# Altium PCB JacdacRgbLedRing8 37.PcbDoc
Units mm, origin at the board's own origin, x right, y up, seen from the top; angles counter-clockwise.
Board outline 34 x 37.5 mm, 2 copper layers (Top Layer, Bottom Layer), stack 1.525 mm thick; 40 components, 24 nets, 129 pads, 26 vias.
Unrouted connection lines stored in the file: 14.
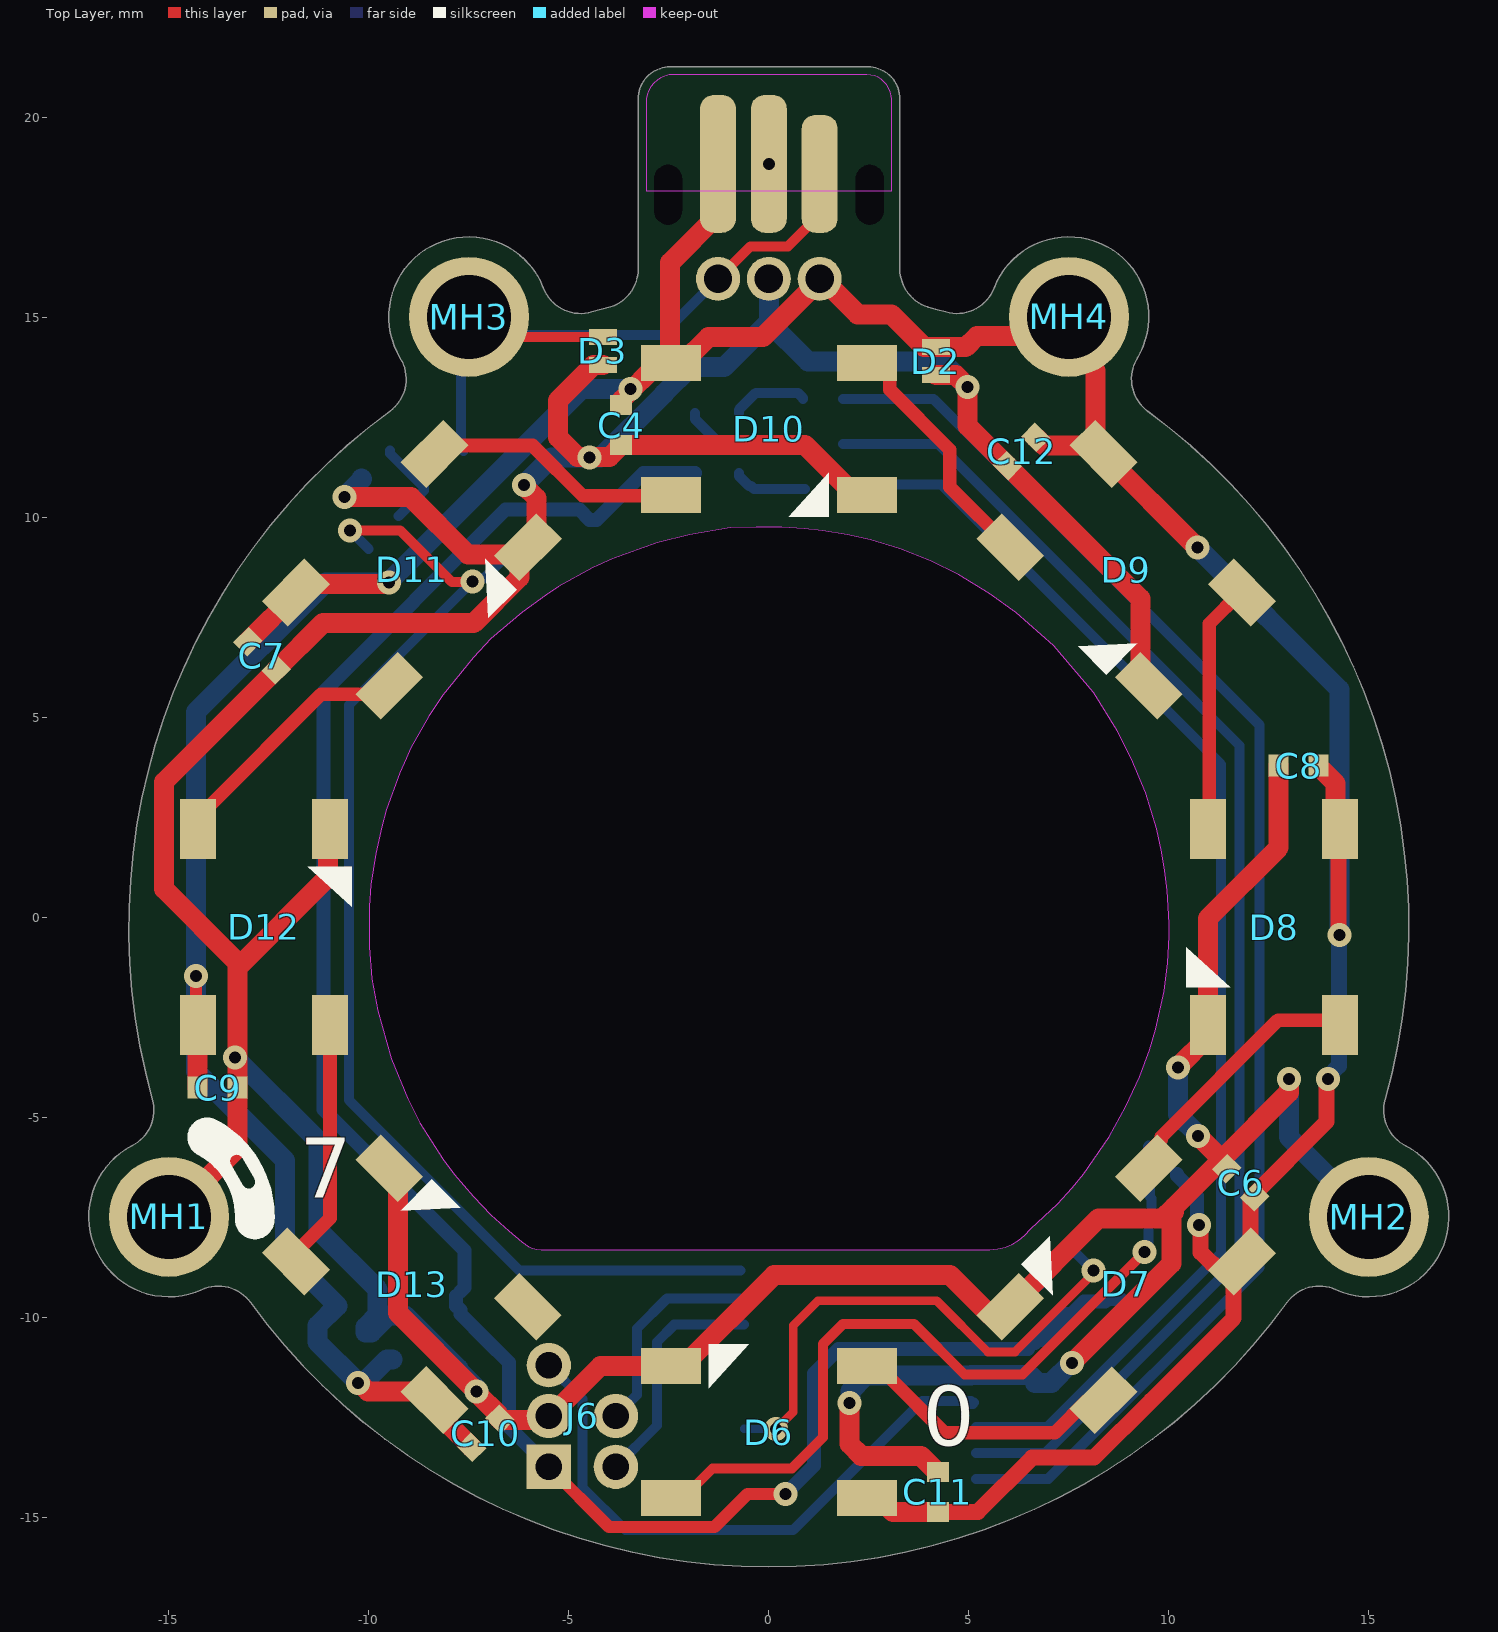
[diagram p0: Top Layer view]
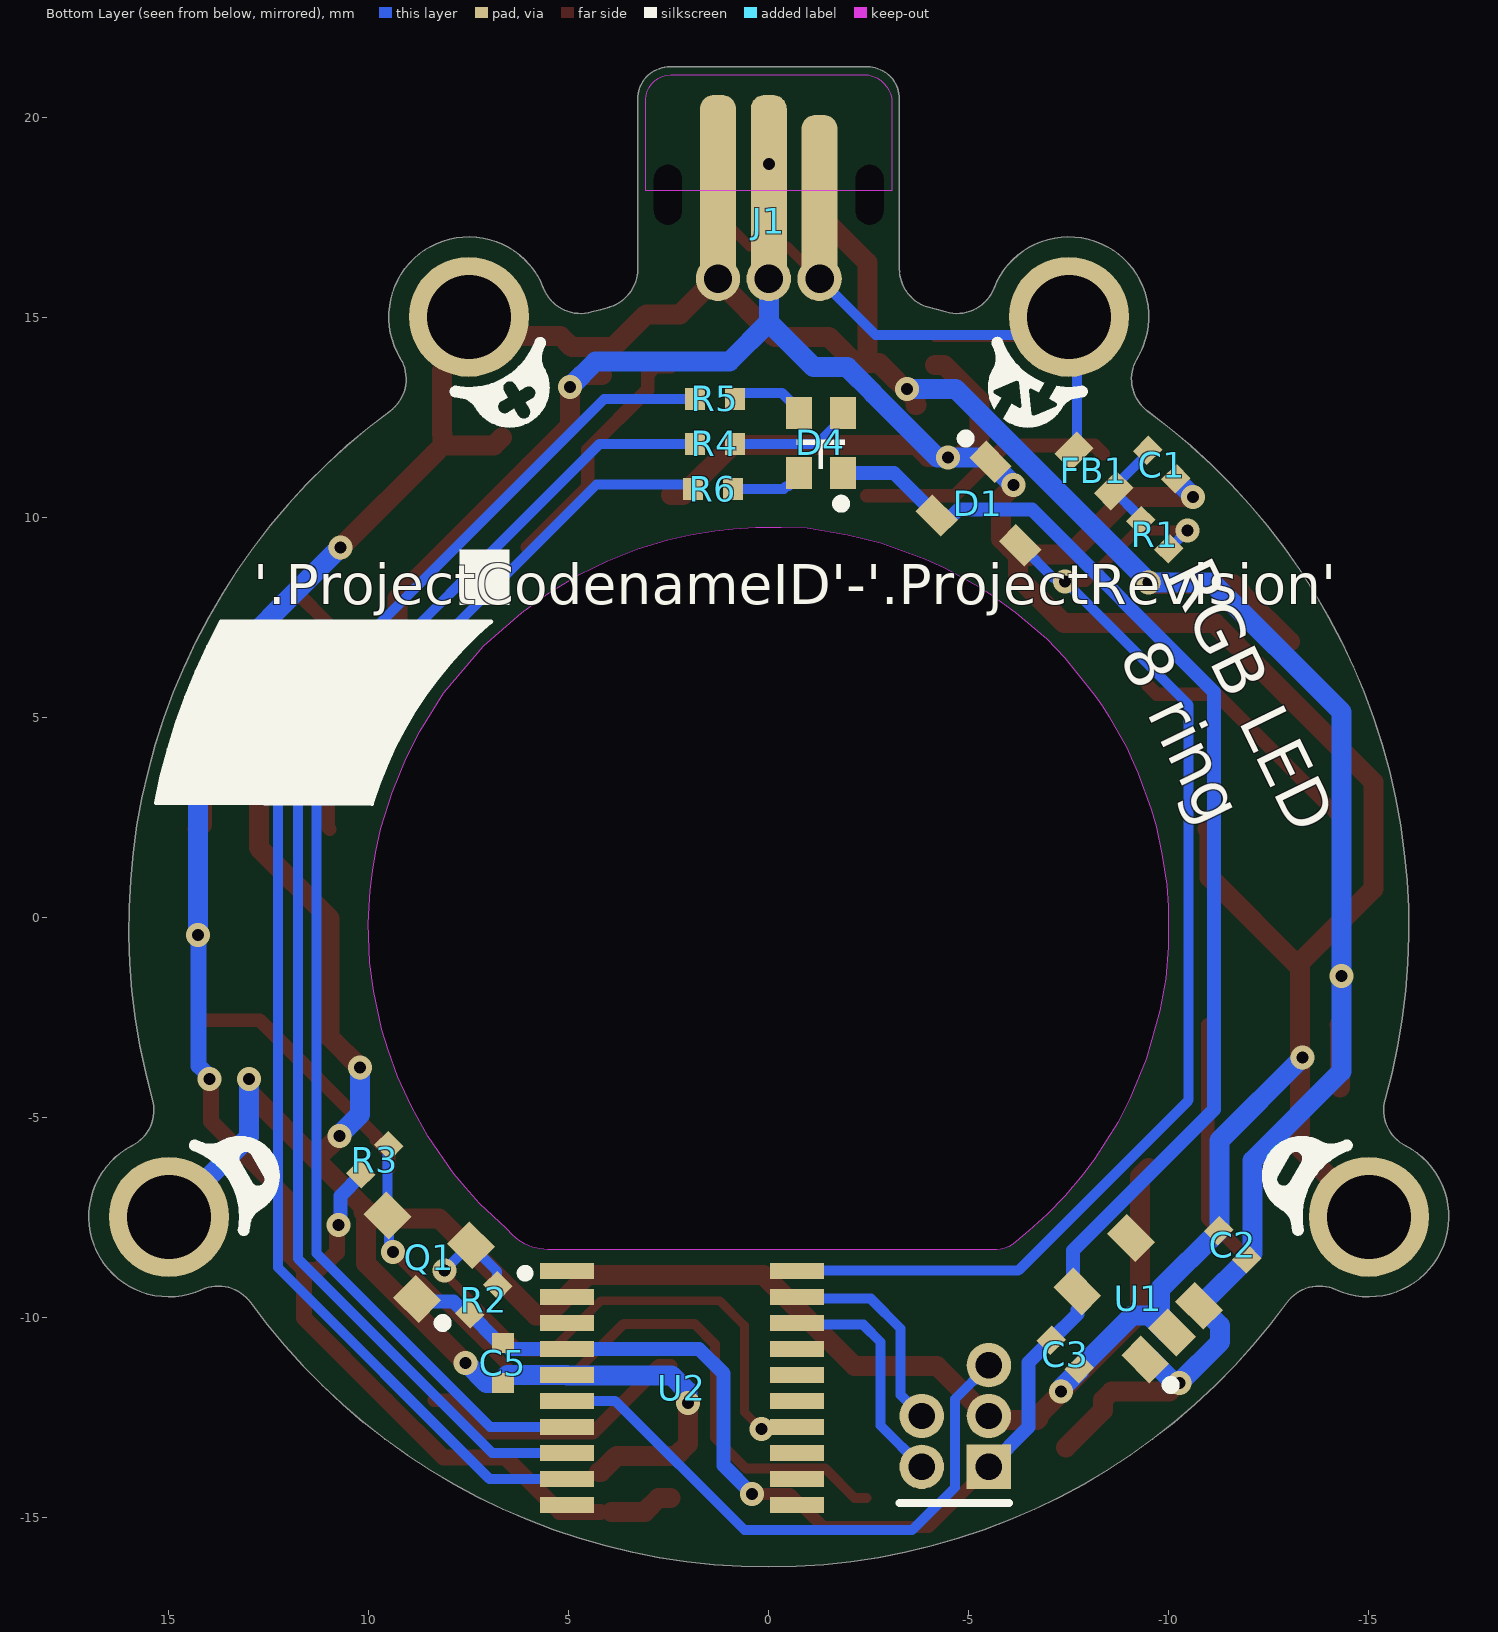
[diagram p1: Bottom Layer view, seen from below]
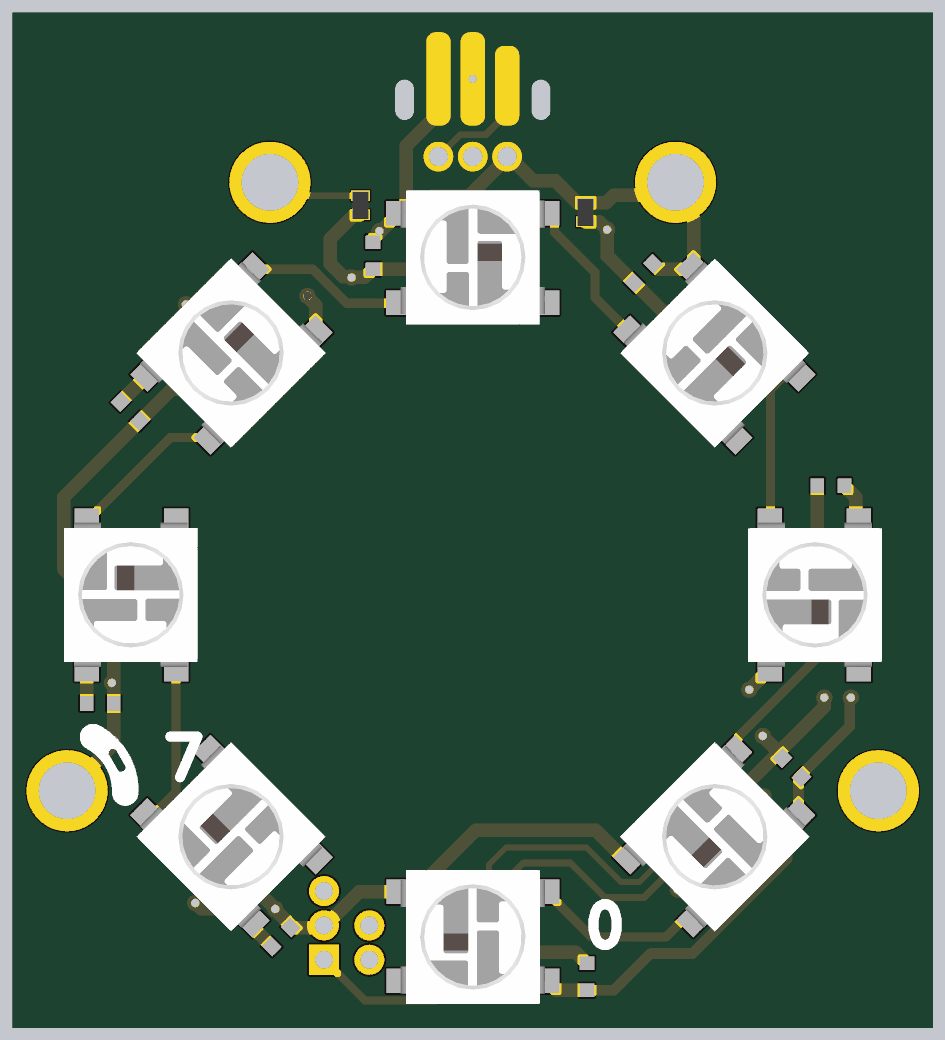
[diagram p2: 3D render of the assembled board from above, using the file's embedded part models]

## Layer stack, top to bottom
Top Solder: solder mask 0.0102, Solder Resist, Dk 3.5
Top Layer: signal copper 0.0356
Dielectric 1: core 1.454, FR-4, Dk 4.2
Bottom Layer: signal copper 0.0356
Bottom Solder: solder mask 0.0102, Solder Resist, Dk 3.5

## Board outline
-14.177,-9.297 cw(c-13.764,-10.209) -12.955,-9.622 ccw(c-0.001,-0.23) 12.953,-9.622 cw(c13.762,-10.209) 14.175,-9.297 ccw(c14.999,-7.475) 15.914,-5.697 cw(c16.371,-4.807) 15.408,-4.538 ccw(c-0.001,-0.23) 9.472,12.664 cw(c10.064,13.47) 9.209,13.988 ccw(c7.499,15.025) 5.634,15.746 cw(c4.701,16.107) 4.424,15.146 ccw(c0.003,-0.214) 3.99,15.264 ccw(c3.944,15.182) 3.963,15.274 cw(c4.276,16.225) 3.275,16.224 3.275,20.475 ccw(c2.476,20.475) 2.476,21.274 -2.466,21.274 ccw(c-2.466,20.475) -3.265,20.475 -3.265,16.224 cw(c-4.266,16.225) -3.953,15.274 ccw(c-0.003,-0.223) -4.426,15.146 cw(c-4.703,16.107) -5.636,15.746 ccw(c-7.501,15.025) -9.211,13.988 cw(c-10.067,13.47) -9.474,12.664 ccw(c-0.001,-0.23) -15.41,-4.538 cw(c-16.373,-4.807) -15.916,-5.697 ccw(c-15.001,-7.475)
cut-out: -9.775,-2.33 -9.44,-3.53 -9.028,-4.53 -8.721,-5.124 -8.153,-6.02 -7.862,-6.41 -7.394,-6.962 -6.95,-7.43 -6.5,-7.83 -6.177,-8.094 ccw(c-5.695,-7.613) -5.694,-8.294 -5.578,-8.293 5.529,-8.293 ccw(c5.527,-7.062) 6.396,-7.934 6.55,-7.78 7.225,-7.155 7.581,-6.751 7.873,-6.396 8.513,-5.476 8.925,-4.73 9.27,-3.98 9.518,-3.304 9.675,-2.783 9.88,-1.839 9.972,-1.121 10.006,-0.462 10.014,-0.149 9.988,0.27 9.96,0.69 9.902,1.177 9.825,1.641 9.695,2.22 9.418,3.131 9.066,3.99 8.713,4.679 8.125,5.62 7.125,6.795 6.18,7.632 5.529,8.102 4.75,8.57 4.031,8.922 3.27,9.22 2.53,9.445 1.958,9.576 1.35,9.678 0.889,9.73 0.328,9.759 -0.311,9.767 -0.966,9.755 -1.977,9.573 -2.794,9.372 -3.901,8.977 -4.403,8.748 -5.267,8.271 -5.578,8.069 -6.165,7.634 -6.95,6.97 -7.394,6.503 -8.153,5.56 -8.332,5.299 -8.498,5.041 -8.95,4.245 -9.065,3.991 -9.225,3.62 -9.559,2.707 -9.682,2.27 -9.825,1.595 -9.95,0.82 -9.987,0.27 -9.987,-0.73 -9.925,-1.53

## Design rules (kind name [scope] priority, off if disabled: settings)
AssemblyTestPointUsage [All] p1: valid=2
BoardOutlineClearance BoardOutlineSwitchClearance [InComponent('SW1')] p1: gap=0.3 ignorepadtopadclearanceinfootprint=FALSE except(0: Arc-SplitContinuation Track-SplitContinuation SMDPad-SplitContinuation THPad-OutlineEdge THPad-SplitContinuation Via-SplitContinuation Fill-SplitContinuation Poly-SplitContinuation Region-SplitContinuation Text-SplitContinuation; 0.2: Text-OutlineEdge)
BoardOutlineClearance [All] p2: gap=0.3 ignorepadtopadclearanceinfootprint=FALSE except(0: Arc-SplitContinuation Track-OutlineEdge Track-CutoutEdge Track-SplitContinuation SMDPad-SplitContinuation THPad-SplitContinuation Via-SplitContinuation Fill-SplitContinuation Poly-SplitContinuation Region-OutlineEdge Region-SplitContinuation Text-OutlineEdge Text-SplitContinuation; 0.2: SMDPad-CutoutEdge THPad-OutlineEdge; 0.25: Arc-OutlineEdge Arc-CutoutEdge SMDPad-OutlineEdge Poly-OutlineEdge Region-CutoutEdge)
Clearance [All] p1: gap=0.125 ignorepadtopadclearanceinfootprint=FALSE except(0: Arc-Hole Track-Hole SMDPad-Hole THPad-Hole Via-Hole Fill-Hole Poly-Hole Region-Hole Text-Hole)
ComponentClearance MH5.0KeepoutaAreaClearance [InComponent('MH1') or InComponent('MH2')  or InComponent('MH3') or InComponent('MH4') vs InComponent('D6') or InComponent('D7') or InComponent('D8') or InComponent('D9') or InComponent('D10') or InComponent('D11') or InComponent('D12') or InComponent('D13') or InComponent('C6') or InComponent('C7') or InComponent('C8')  or  InComponent('C9') or  InComponent('C12')] p1: gap=0 collisioncheckmode=3 verticalgap=0 showdistances=FALSE
ComponentClearance [All] p2: gap=0.2 collisioncheckmode=3 verticalgap=0.2 showdistances=FALSE
DiffPairsRouting [All] p1: maxlimit=2 minlimit=0.15 mostfreqgap=0.15 toplayer_minwidth=0.15 toplayer_maxwidth=2 toplayer_prefwidth=0.15 bottomlayer_minwidth=0.15 bottomlayer_maxwidth=2 bottomlayer_prefwidth=0.15 substack1={CB9D278B-8BF5-444A-AAF4-837A2A9DF42D} toplayer_{cb9d278b-8bf5-444a-aaf4-837a2a9df42d}_minwidth=0.381 toplayer_{cb9d278b-8bf5-444a-aaf4-837a2a9df42d}_maxwidth=0.381 toplayer_{cb9d278b-8bf5-444a-aaf4-837a2a9df42d}_prefwidth=0.381 bottomlayer_{cb9d278b-8bf5-444a-aaf4-837a2a9df42d}_minwidth=0.381 bottomlayer_{cb9d278b-8bf5-444a-aaf4-837a2a9df42d}_maxwidth=0.381 bottomlayer_{cb9d278b-8bf5-444a-aaf4-837a2a9df42d}_prefwidth=0.381 substack2={826B8647-A721-4255-895A-19F9591B9CD1} toplayer_{826b8647-a721-4255-895a-19f9591b9cd1}_minwidth=0.381 toplayer_{826b8647-a721-4255-895a-19f9591b9cd1}_maxwidth=0.381 toplayer_{826b8647-a721-4255-895a-19f9591b9cd1}_prefwidth=0.381 bottomlayer_{826b8647-a721-4255-895a-19f9591b9cd1}_minwidth=0.381 bottomlayer_{826b8647-a721-4255-895a-19f9591b9cd1}_maxwidth=0.381 bottomlayer_{826b8647-a721-4255-895a-19f9591b9cd1}_prefwidth=0.381 substack3={E64FCAF4-1BC8-437D-B1E0-0E5F2DC0F59E} toplayer_{e64fcaf4-1bc8-437d-b1e0-0e5f2dc0f59e}_minwidth=0.381 toplayer_{e64fcaf4-1bc8-437d-b1e0-0e5f2dc0f59e}_maxwidth=0.381 toplayer_{e64fcaf4-1bc8-437d-b1e0-0e5f2dc0f59e}_prefwidth=0.381 bottomlayer_{e64fcaf4-1bc8-437d-b1e0-0e5f2dc0f59e}_minwidth=0.381 bottomlayer_{e64fcaf4-1bc8-437d-b1e0-0e5f2dc0f59e}_maxwidth=0.381 bottomlayer_{e64fcaf4-1bc8-437d-b1e0-0e5f2dc0f59e}_prefwidth=0.381 substack4={E61CE66C-507C-4E1E-8E83-C905434AFC1C} toplayer_{e61ce66c-507c-4e1e-8e83-c905434afc1c}_minwidth=0.381 toplayer_{e61ce66c-507c-4e1e-8e83-c905434afc1c}_maxwidth=0.381 toplayer_{e61ce66c-507c-4e1e-8e83-c905434afc1c}_prefwidth=0.381 bottomlayer_{e61ce66c-507c-4e1e-8e83-c905434afc1c}_minwidth=0.381 bottomlayer_{e61ce66c-507c-4e1e-8e83-c905434afc1c}_maxwidth=0.381 bottomlayer_{e61ce66c-507c-4e1e-8e83-c905434afc1c}_prefwidth=0.381 maxuncoupledlength=25
FabricationTestPointUsage [All] p1: valid=2 allowmultiple=FALSE
HoleSize [All] p1: absolutevalues=TRUE maxlimit=2.54 minlimit=0.2 maxpercent=80.000 minpercent=20.000
MinimumSolderMaskSliver [All] p1: minsoldermaskwidth=0.005
PlaneClearance [All] p1: clearance=0.3
PlaneConnect [All] p1: planeconnectstyle=Relief reliefexpansion=0.5 reliefentries=4 reliefconductorwidth=0.2 reliefairgap=0.3
PolygonConnect "PolygonConnect GND" [isVIA] p1: connectstyle=Relief reliefconductorwidth=0.2 reliefentries=4 polygonreliefangle="90 Angle" airgapwidth=0.2
PolygonConnect [All] p2: connectstyle=Relief reliefconductorwidth=0.2 reliefentries=4 polygonreliefangle="90 Angle" airgapwidth=0.2
RoutingVias [All] p1: holewidth=0.3 width=0.6 viastyle="Through Hole" minholewidth=0.3 minwidth=0.6 maxholewidth=0.3 maxwidth=0.8
SilkToSilkClearance [All] p1: silktosilkclearance=0.001
SilkToSolderMaskClearance [IsPad] p1: minsilkscreentomaskgap=0.05 clearancetoexposedcopper=TRUE
SolderMaskExpansion [All] p1: expansion=0.075 istentingtop=FALSE
Width [All] p1: maxlimit=2 minlimit=0.15 preferedwidth=0.15 substack1={CB9D278B-8BF5-444A-AAF4-837A2A9DF42D} substack2={826B8647-A721-4255-895A-19F9591B9CD1} substack3={E64FCAF4-1BC8-437D-B1E0-0E5F2DC0F59E} substack4={E61CE66C-507C-4E1E-8E83-C905434AFC1C} minimp=50.000000 maximp=50.000000 favimp=50.000000
20 further rules are at their usual default settings.

## Components (designator, comment, footprint, x,y, rotation, side; value= is the part's Value field where it differs from the comment)
C1 "CL05C330JB51PNC" "C0402_0.55MM - WITHOUT OUTLINE" -9.825,11.33 r45 bottom
C2 "CL05A105KP5NNNC" "C0402_0.55MM - WITHOUT OUTLINE" -11.6,-8.175 r225 bottom
C3 "CL05A105KP5NNNC" "C0402_0.55MM - WITHOUT OUTLINE" -7.411,-10.915 r45 bottom
C4 "CL05B104KP5NNNC" "C0402_0.55MM - WITHOUT OUTLINE" -3.695,12.317 r90 top
C5 "CL05A105KP5NNNC" "C0402_0.55MM - WITHOUT OUTLINE" 6.65,-11.125 r90 bottom
C6 "CL05B104KP5NNNC" "C0402_0.55MM - WITHOUT OUTLINE" 11.8,-6.625 r315 top
C7 "CL05B104KP5NNNC" "C0402_0.55MM - WITHOUT OUTLINE" -12.672,6.55 r135 top
C8 "CL05B104KP5NNNC" "C0402_0.55MM - WITHOUT OUTLINE" 13.247,3.806 r0 top
C9 "CL05B104KP5NNNC" "C0402_0.55MM - WITHOUT OUTLINE" -13.778,-4.244 r180 top
C10 "CL05B104KP5NNNC" "C0402_0.55MM - WITHOUT OUTLINE" -7.078,-12.886 r225 top
C11 "CL05B104KP5NNNC" "C0402_0.55MM - WITHOUT OUTLINE" 4.225,-14.35 r270 top
C12 "CL05B104KP5NNNC" "C0402_0.55MM - WITHOUT OUTLINE" 6.317,11.658 r45 top
D1 "BAT54S" "NXP-BAT54S-TO-236AB - WITHOUT OUTLINE" -5.578,10.02 r225 bottom
D2 "RCLAMP0521P-N" "TVS 0402 - L" 4.174,13.915 r270 top
D3 "RCLAMP0521P-N" "TVS 0402 - L" -4.15,14.175 r270 top
D4 "TZ-P4-1615RGBTCA1-0.55T" TZ-P4-1615RGBTCA1-0.55T -1.3,11.875 r90 bottom
D6 "WS2812E" WS2812E-5050 0.004,-12.856 r180 top
D7 "WS2812E" WS2812E-5050 8.931,-9.159 r225 top
D8 "WS2812E" WS2812E-5050 12.63,-0.232 r270 top
D9 "WS2812E" WS2812E-5050 8.932,8.696 r315 top
D10 "WS2812E" WS2812E-5050 0,12.225 r0 top
D11 "WS2812E" WS2812E-5050 -8.922,8.697 r45 top
D12 "WS2812E" WS2812E-5050 -12.621,-0.23 r90 top
D13 "WS2812E" WS2812E-5050 -8.923,-9.158 r135 top
FB1 "TDK MPZ1608S102ATA00" "TDK MPZ1608 0.8mm - without outline" -8.125,11.175 r225 bottom
J1 "3 pin JACDAC edge connector" JACDAC_EDGE_CONNECTOR_NO_TRACES 0,15.425 r180 bottom
J6 "Hack Connect Mini 1.27 mm pitch 2-row" HACK_CONNECT_MINI_5_X_1_27 -5.501,-13.725 r0 top
MH1 "MH_5.0MMK_3.0MMC_2.1MMD_PTH" MH_5.0MMK_3.0MMC_2.1MMD_PTH -15.001,-7.475 r90 top
MH2 "MH_5.0MMK_3.0MMC_2.1MMD_PTH" MH_5.0MMK_3.0MMC_2.1MMD_PTH 14.998,-7.476 r45 top
MH3 "MH_5.0MMK_3.0MMC_2.1MMD_PTH" MH_5.0MMK_3.0MMC_2.1MMD_PTH -7.501,15.025 r90 top
MH4 "MH_5.0MMK_3.0MMC_2.1MMD_PTH" MH_5.0MMK_3.0MMC_2.1MMD_PTH 7.499,15.025 r0 top
Q1 "2N7002K" SOT-23 8.825,-8.15 r45 bottom
R1 "RC0402FR-07220RL" "R0402 - Without outline" -9.65,9.575 r45 bottom
R2 "10k" "R0402 - Without outline" 7.125,-9.55 r135 bottom
R3 "10k" "R0402 - Without outline" 9.85,-6.05 r135 bottom
R4 "RC0402FR-0730RL" "R0402 - WITHOUT OUTLINE" 1.35,11.85 r0 bottom
R5 "RC0402FR-0730RL" "R0402 - Without outline" 1.35,12.975 r0 bottom
R6 "RC0402FR-07150RL" "R0402 - Without outline" 1.4,10.725 r0 bottom
U1 "LDO 3.3V/300 mA" "ON_SEMI-SOT23-5 - WITHOUT OUTLINE" -9.234,-9.523 r45 bottom
U2 "STM32G031F6P6" 20-TSSOP 2.175,-11.75 r180 bottom

## Footprints (in the part's own frame and the unit in brackets; to place one, negate y for a bottom-side part, rotate by r counter-clockwise, add the part's x,y. Pads: shape width x height; smd on the part's side, far side on the other; paste and mask are expansions set on the pad)
20-TSSOP [mm] "0.173\", 4.40mm Width"
  rect 1.35x0.4 smd: 1(-2.875,2.925) 2(-2.875,2.275) 3(-2.875,1.625) 4(-2.875,0.975) 5(-2.875,0.325) 6(-2.875,-0.325) 7(-2.875,-0.975) 8(-2.875,-1.625) 9(-2.875,-2.275) 10(-2.875,-2.925) 11(2.875,-2.925) 12(2.875,-2.275) 13(2.875,-1.625) 14(2.875,-0.975) 15(2.875,-0.325) 16(2.875,0.325) 17(2.875,0.975) 18(2.875,1.625) 19(2.875,2.275) 20(2.875,2.925)
  silkscreen extent -4,2.78 -3.83,2.95, body extent -3.3,-3.3 3.3,3.3, height 1.2
"C0402_0.55MM - WITHOUT OUTLINE" [mm]
  rect 0.5x0.55 smd: 1(-0.5,0) 2(0.5,0)
  body extent -0.5,-0.25 0.5,0.25, height 0.55
HACK_CONNECT_MINI_5_X_1_27 [mm]
  rect 1.11x1.11 hole 0.66: 1(0,0)
  round 1.11 hole 0.66: 2(1.676,0) 3(0,1.27) 4(1.676,1.27) 5(0,2.54)
JACDAC_EDGE_CONNECTOR_NO_TRACES [mm] "JacDac 3 pin connector with no traces"
  rrect78% 0.9x2.95 smd far side paste-1 mask+0: 1(-1.27,3.175)
  round 1.11 / inner round 0.71 / far side round 1.1 hole 0.71 paste-0.254 mask+0: 1(1.27,0.55) 2(0,0.55) 3(-1.27,0.55)
  rrect78% 0.9x4.3 smd paste-1 mask+0: 1(1.27,2.5)
  rrect78% 0.9x4.8 smd paste-1 mask+0: 2(0,2.75) 3(-1.27,2.75)
  rrect78% 0.9x3.45 smd far side paste-1 mask+0: 2(0,3.425) 3(1.27,3.425)
  round 0 hole 0.7 slot 1.5 at 90 deg unplated: ""(-2.52,2.65) ""(2.52,2.65)
  Top Layer keep-out region: -3.075,2.75 -3.07,5.033 -2.987,5.341 -2.761,5.567 -2.453,5.65 -2.453,5.65 2.27,5.65 2.545,5.635 2.794,5.516 2.978,5.31 3.07,5.05 3.07,5.05 3.07,2.75
  Bottom Layer keep-out region: -3.07,2.75 -3.07,5.033 -3.023,5.269 -2.889,5.469 -2.689,5.603 -2.453,5.65 -2.453,5.65 2.27,5.65 2.545,5.635 2.794,5.516 2.978,5.31 3.07,5.05 3.07,5.05 3.07,2.75
MH_5.0MMK_3.0MMC_2.1MMD_PTH [mm] "Mounting Hole 5.0mm clearance, 3.1 annualar ring and 2.1mm PTH"
  round 3 hole 2.1 mask+0.05: 1(0,0)
"NXP-BAT54S-TO-236AB - WITHOUT OUTLINE" [mm] "SOT23, 3-Leads, Body 2.90x2.30mm, Pitch 0.95mm, IPC Medium Density"
  rect 0.9x0.6 smd: 1(-1,0.95) 2(-1,-0.95) 3(1,0)
  silkscreen extent -1.95,0.83 -1.75,1.02, body extent -1.32,-1.5 1.32,1.5, height 1.12
"ON_SEMI-SOT23-5 - WITHOUT OUTLINE" [mm]
  rect 1x0.7 smd: 1(-1.2,0.95) 2(-1.2,0) 3(-1.2,-0.95) 4(1.2,-0.95) 5(1.2,0.95)
  silkscreen extent -2.2,0.85 -2,1.05, body extent -1.5,-1.57 1.5,1.58, height 1.1
"R0402 - Without outline" [mm]
  rect 0.5x0.55 smd: 1(-0.5,0) 2(0.5,0)
  body extent -0.5,-0.25 0.5,0.25, height 0.35
"R0402 - WITHOUT OUTLINE" [mm]
  rect 0.5x0.55 smd: 1(-0.5,0) 2(0.5,0)
  body extent -0.5,-0.25 0.5,0.25, height 0.35
SOT-23 [mm] "SOT23, 3-Leads, Body 2.90x2.45mm, Pitch 0.95mm, IPC Medium Density"
  rect 0.9x0.8 smd: 1(-1,0.95) 2(-1,-0.95) 3(1,0)
  silkscreen extent -1.97,0.83 -1.78,1.02, body extent -1.27,-1.5 1.23,1.5, height 1.1
"TDK MPZ1608 0.8mm - without outline" [mm]
  rect 0.6x0.8 smd paste-0.1: 1(-0.7,0) 2(0.7,0)
  body extent -0.8,-0.4 0.8,0.4, height 0.8
"TVS 0402 - L" [mm] "TVS 0402 RoHS"
  rect 0.4x0.7 smd paste-0.038 mask+0.05: 1(-0.35,0) 2(0.35,0)
  body extent -0.5,-0.3 0.5,0.3, height 0.5
TZ-P4-1615RGBTCA1-0.55T [mm] "1615 Light Emitting Diodes (LED) RoHS"
  rect 0.8x0.65 smd mask+0.05: 1(-0.75,-0.55) 2(-0.75,0.55) 3(0.75,0.55) 4(0.75,-0.55)
  silkscreen extent -1.62,-0.61 0.07,0.6, body extent -0.8,-0.75 0.8,0.75, height 0.55
WS2812E-5050 [mm] "SMD-5050 Light Emitting Diodes"
  rect 1.5x0.9 smd: 1(-2.45,1.65) 2(-2.45,-1.65) 3(2.45,-1.65) 4(2.45,1.65)
  silkscreen extent 0.5,-2.2 1.5,-1.1, body extent -2.68,-2.45 2.67,2.5, height 1.5

## Part data
C1: "CAP CER 33PF 50V NP0 0402", Capacitance=33pF, Case Code (Imperial)=0402, Case Code (Metric)=1005, Manufacturer=Samsung, Max Operating Temperature=125°C, Min Operating Temperature=-55°C, Ratings=AEC-Q200, Supplier Part Number 1=1276-6515-1-ND, Tolerance=5%, Voltage Rating=50V, Case/Package=0402, Category=Capacitors, Checked=?, ComponentLink1Description="Samsung datasheet online", ComponentLink1URL=http://www.samsungsem.com/kr/support/library/product-catalog/mlcc.jsp, Created=DG, Lead Free="Lead Free", Length=0.039inch, Manufacturer Part Number=CL05C330JB51PNC, Mount="Surface Mount", Packaging="Tape and Reel", Pricing 1="1=0.10000, 10=0.07500, 50=0.04060, 100=0.03320, 500=0.02374, 1000=0.01865, 2500=0.01696, 5000=0.01560 (USD)", Pricing 2="1=0.11000, 10=0.08200, 100=0.03600, 500=0.02600, 1000=0.02000, 2500=0.01800 (USD)", Pricing 3="10000=0.00780 (USD)", RoHS=Yes, Stock 1=250654, Stock 2=97900, Stock 3=100000, Supplier 1=Digi-Key, Supplier 2=Mouser, Supplier 3="Future Electronics", Supplier Part Number 2=187-CL05C330JB51PNC, Supplier Part Number 3=6022520, Thickness=0.022inch, Width=0.02inch
C2 C3 C5: "CAP CER 1UF 10V X5R 0402", Capacitance=1µF, Case Code (Imperial)=0402, Case Code (Metric)=1005, Dielectric=X5R, Manufacturer=Samsung, Max Operating Temperature=85°C, Min Operating Temperature=-55°C, Package Quantity=1, Supplier Part Number 1=1276-1076-1-ND, Tolerance=10%, Voltage Rating=10V, Case/Package=0402, Category=Capacitors, Checked=?, ComponentLink1Description="Online datasheet", ComponentLink1URL=https://datasheet.ciiva.com/15195/getdatasheetpartid-358390-15195630.pdf, Contact Plating=Tin, Created=DG, Depth=0.5mm, Height=0.5mm, Length=1mm, Manufacturer Part Number=CL05A105KP5NNNC, Material=Ceramic, Mount="Surface Mount", Packaging="Tape and Reel", Pricing 1="1=0.10000, 10=0.03900, 50=0.02100, 100=0.01720, 500=0.01228, 1000=0.00965, 2500=0.00877, 5000=0.00807 (USD)", Pricing 2="1=0.10000, 10=0.04200, 100=0.01800, 500=0.01300, 1000=0.01000, 2500=0.00900 (USD)", Pricing 3="10=0.02450, 100=0.02000, 500=0.01310, 2500=0.00920, 5000=0.00810, 10000=0.00640, 50000=0.00490 (GBP)", Radiation Hardening=No, RoHS=Yes, Stock 1=5705569, Stock 2=928941, Stock 3=53670, Supplier 1=Digi-Key, Supplier 2=Mouser, Supplier 3=Farnell, Supplier Part Number 2=187-CL05A105KP5NNNC, Supplier Part Number 3=3013329, Thickness=0.022inch, Width=0.02inch
C4 C6 C7 C8 C9 C10 C11 C12: "CAP CER 0.1UF 10V X7R 0402", Capacitance=100nF, Case Code (Imperial)=0402, Case Code (Metric)=1005, Dielectric=X7R, Manufacturer=Samsung, Max Operating Temperature=125°C, Min Operating Temperature=-55°C, Package Quantity=1, Supplier Part Number 1=1276-1002-1-ND, Tolerance=10%, Voltage Rating=10V, Case/Package=0402, Category="Ceramic Capacitors", Checked=?, ComponentLink1Description="Samsung datasheet online", ComponentLink1URL=https://datasheet.ciiva.com/15165/getdatasheetpartid-37100-15165107.pdf, Contact Plating=Tin, Created=DG, Depth=0.5mm, Height=0.5mm, Length=1mm, Manufacturer Part Number=CL05B104KP5NNNC, Mount="Surface Mount", Packaging="Tape and Reel", Pricing 1="1=0.10000, 10=0.02500, 50=0.01380, 100=0.01130, 500=0.00804, 1000=0.00632, 2500=0.00575, 5000=0.00529 (USD)", Pricing 2="10000=0.00400, 20000=0.00400, 50000=0.00400 (USD)", Pricing 3="10=0.01620, 100=0.01310, 500=0.00740, 2500=0.00600, 5000=0.00470, 10000=0.00400, 50000=0.00320 (GBP)", Pricing 4="1=0.09000, 25=0.02300, 100=0.01000, 250=0.00900, 500=0.00700, 1000=0.00500, 2500=0.00500 (USD)", Pricing 5="1=0.00460, 500=0.00340, 1500=0.00320, 2500=0.00310, 5000=0.00300 (USD)", Radiation Hardening=No, RoHS=Yes, Stock 1=17321183, Stock 2=984124, Stock 3=39022, Stock 4=56730, Stock 5=20877033, Supplier 1=Digi-Key, Supplier 2=Mouser, Supplier 3=Farnell, Supplier 4=Newark, Supplier 5="Future Electronics", Supplier Part Number 2=187-CL05B104KP5NNNC, Supplier Part Number 3=3013351, Supplier Part Number 4=82AC9219, Supplier Part Number 5=9032525, Thickness=0.022inch, Width=0.02inch
D1: "DIODE ARRAY SCHOTTKY 30V SOT23", Manufacturer=Nexperia, Manufacturer Part Number=BAT54S,235, Supplier Part Number 1=1727-1868-1-ND, Category="Rectifier Diodes", ComponentLink1Description="NXP datasheet online", ComponentLink1URL=https://assets.nexperia.com/documents/data-sheet/BAT54_SER.pdf, Pricing 1="1=0.13000, 10=0.11900, 100=0.05610, 500=0.03326, 1000=0.02185, 5000=0.02138 (USD)", RoHS=No, Stock 1=14011, Supplier 1=Digi-Key, Supplier 2=Mouser, Supplier 3=RSComponents, Supplier Part Number 2=771-BAT54S235, Supplier Part Number 3=1707990
D2 D3: "Bidirectional 5V (Max) 6V 16V 3.5A (8/20us) 0402 TVS RoHS", Manufacturer="Born Semiconductor", Package=0402, Supplier1 Part Number=C316043, Checked By=?, ComponentLink1Description="Online datasheet", ComponentLink1URL=https://datasheet.lcsc.com/szlcsc/Bourne-Semicon-Shenzhen-RCLAMP0521P-N_C316043.pdf, Created By="D Gakure", Manufacturer Part Number=RCLAMP0521P-N, Supplier1=LCSC
D4: "1615 Light Emitting Diodes (LED) RoHS", Manufacturer=TUOZHAN, Package=1615, Supplier 1 Part Number=C779813, Category=Optoelectronics, Checked By=?, ComponentLink1Description="Online datasheet", ComponentLink1URL=https://datasheet.lcsc.com/szlcsc/2009041238_TUOZHAN-TZ-P4-1615RGBTCA1-0-55T_C779813.pdf, Created By="D. Gakure", Manufacturer Part Number=TZ-P4-1615RGBTCA1-0.55T, Packaging="Tape & Reel (TR)", RoHS="RoHS Compliant", Size / Dimension=1.6x1.5mm, Supplier 1=LCSC
D6 D7 D8 D9 D10 D11 D12 D13: library part WS2812E-5050, "WS2812E 5050 RGB LED WITH INTEGRATED DRIVER", Color=Blue,Green,Red, Manufacturer=Worldsemi, Supplier 1 Part Number 3=C139127, Category=LEDs, ComponentLink1Description="Online datasheet", ComponentLink1URL=https://datasheet.lcsc.com/lcsc/1811151230_Worldsemi-WS2812E_C139127.pdf, Length=5mm, Manufacturer Part Number=WS2812E, Mount="Surface Mount", RoHS=Yes, Supplier 1=LCSC, Width=5mm
FB1: "0603 1k@100MHz 0.8A chip", Case Code (Imperial)=0603, Case Code (Metric)=1608, Current Rating=800mA, DC Resistance (DCR)=300mR, Manufacturer=TDK, Manufacturer Part Number=MPZ1608S102ATA00, Package Quantity=4000, Supplier Part Number 1=445-8694-1-ND, Tolerance=25%, Case/Package=0603, ComponentLink2Description="datasheet online", ComponentLink2URL=https://www.mouser.co.uk/datasheet/2/400/eads_commercial_power_mpz1608_en-923650.pdf, ComponentLink3Description=datasheet, ComponentLink3URL="Y:\System\Altium\Libraries 2014\TDK\Datasheets\eads_commercial_power_mpz1608_en-923650.pdf", Core Material=Ferrite, Height=0.037inch, Impedance="1kR @ 100MHz", Length=0.063inch, Max DC Current=800mA, Mount="Surface Mount", Packaging="Tape and Reel", Pricing 1="1=0.1, 10=0.079, 25=0.0716, 50=0.0644, 100=0.0472, 250=0.03432, 500=0.03146, 1000=0.02717 (USD)", Stock 1=113542, Supplier 1=Digi-Key, Supplier 2=Mouser, Supplier Part Number 2=810-MPZ1608S102ATA00, Width=0.031inch
J1: library part "Jacdac edge connector", "3 pin Jacdac edge connector 1.27mm pitch", Manufacturer Part Number=JACDAC_EDGE_CONNECTOR, Checked By=?, ComponentLink1Description="Yuliang JACDAC cable connector drawing online", ComponentLink1URL=https://github.com/microsoft/jacdac-mdk/blob/main/connector/JACDAC-Connector-by-Yuliang-2020-11-28.pdf, ComponentLink2Description="JACDAC PCB edge connector spec onlin", ComponentLink2URL=https://github.com/microsoft/jacdac-mdk/blob/main/connector/JACDAC_PCB_Edge_Connector_Drawing_JD-PEC-01_rev_01.pdf, Created By="D. Gakure", PCB Type="1.6mm FR4"
J6: library part HACK_CONNECT_MINI
MH1 MH2 MH3 MH4: "Mounting Hole 5.0mm keepout, 3.0mm annualar ring and 2.1mm Drill PTH"
Q1: library part "2N7002K (2)", "MOSFET Transistor, N Channel, 300 mA, 60 V, 2 ohm, 10 V, 2.5 V", Case/Package=SOT-23, Continuous Drain Current (ID)=300mA, Drain to Source Breakdown Voltage=60V, Drain to Source Resistance=2R, Gate to Source Voltage (Vgs)=20V, Input Capacitance=50pF, Manufacturer="ON Semiconductor / Fairchild", Max Operating Temperature=150°C, Max Power Dissipation=350mW, Min Operating Temperature=-55°C, Package Quantity=1, Supplier Part Number 1=2N7002KCT-ND, Threshold Voltage=2.5V, Category=MOSFETs, Checked By=?, ComponentLink1Description="Online datasheet", ComponentLink1URL=https://www.onsemi.com/pdf/datasheet/2n7002k-d.pdf, Contact Plating=Tin,Matte, Created By="D. Gakure", Drain to Source Voltage (Vdss)=60V, Drain-source On Resistance-Max=2R, Element Configuration=Single, Height=1.2mm, Lead Free="Lead Free", Length=2.92mm, Manufacturer Part Number=2N7002K, Mount="Surface Mount", Number of Elements=1, Number of Pins=3, On-State Resistance=2R, Packaging="Tape and Reel", Polarity=N-CHANNEL, Power Dissipation=350mW, Pricing 1="1=0.40000, 10=0.32500, 25=0.27240, 100=0.17240, 500=0.11344, 1000=0.07714 (USD)", Pricing 2="1=0.40000, 10=0.27300, 50=0.27300, 100=0.13400, 1000=0.07800, 10000=0.05100 (USD)", Pricing 3="5=0.34800, 10=0.23500, 100=0.09100, 500=0.05850, 3000=0.04630, 9000=0.03860, 24000=0.03750, 45000=0.03530 (GBP)", Radiation Hardening=No, Rds On Max=2R, REACH SVHC="No SVHC", RoHS=Yes, Stock 1=53564, Stock 2=111825, Stock 3=101059, Supplier 1=Digi-Key, Supplier 2=Mouser, Supplier 3=Farnell, Supplier Part Number 2=512-2N7002K, Supplier Part Number 3=2453382, Turn-Off Delay Time=30ns, Turn-On Delay Time=5ns, Voltage=60V, Width=1.3mm
R1: "RES SMD 220 OHM 1% 1/16W 0402", Case Code (Imperial)=0402, Case Code (Metric)=1005, Manufacturer=Yageo, Max Operating Temperature=155°C, Max Power Dissipation=63mW, Min Operating Temperature=-55°C, Package Quantity=1, Power Rating=62.5mW, Resistance=220R, Resistor Type="Thick Film", Supplier Part Number 1=311-220LRCT-ND, Temperature Coefficient=100ppm/°C, Tolerance=1%, Voltage Rating=50V, Case/Package=0402, Category=Resistors, Checked=?, ComponentLink1Description="Online datasheet", ComponentLink1URL=https://datasheet.ciiva.com/11819/0900766b80c66297-11819466.pdf, Created=D.G, Depth=0.5mm, Features="Moisture Resistant", Height=0.016inch, Lead Free="Lead Free", Length=1mm, Manufacturer Part Number=RC0402FR-07220RL, Military Standard=Not, Number of Pins=2, Number of Terminations=2, Packaging="Tape and Reel", Pricing 1="1=0.10000, 10=0.01400, 100=0.00580, 1000=0.00262, 2500=0.00228, 5000=0.00188 (USD)", Pricing 2="1=0.10000, 10=0.01200, 100=0.00400, 1000=0.00400, 2500=0.00400, 10000=0.00300 (USD)", Pricing 3="1=0.08130, 25=0.01210, 100=0.01120, 250=0.01030, 500=0.00900 (GBP)", REACH SVHC="No SVHC", RoHS=Yes, Stock 1=1286042, Stock 2=324625, Stock 3=18234, Supplier 1=Digi-Key, Supplier 2=Mouser, Supplier 3=Farnell, Supplier Part Number 2=603-RC0402FR-07220RL, Supplier Part Number 3=2147864, Termination=SMD/SMT, Voltage Rating (DC)=50V, Width=0.02inch
R2 R3: library part RC0402FR-0710KL, "RES SMD 10K OHM 1% 1/16W 0402", Case Code (Imperial)=0402, Case Code (Metric)=1005, Manufacturer=Yageo, Max Operating Temperature=155°C, Min Operating Temperature=-55°C, Power Rating=62.5mW, Resistance=10kR, Resistor Type="Thick Film", Supplier Part Number 1=311-10.0KLRCT-ND, Temperature Coefficient=100ppm/°C, Tolerance=1%, Voltage Rating=50V, Case/Package=0402, Category=Resistors, Checked=?, ComponentLink1Description=https://datasheet.ciiva.com/7660/38568-7660787.pdf?src-supplier=Element14, ComponentLink1URL=https://datasheet.ciiva.com/7660/38568-7660787.pdf?src-supplier=Element14, ComponentLink2Description=https://datasheet.ciiva.com/7849/1784430-7849813.pdf?src-supplier=Element14, ComponentLink2URL=https://datasheet.ciiva.com/7849/1784430-7849813.pdf?src-supplier=Element14, ComponentLink3Description=https://datasheet.ciiva.com/7849/1686128-7849814.pdf?src-supplier=Element14, ComponentLink3URL=https://datasheet.ciiva.com/7849/1686128-7849814.pdf?src-supplier=Element14, ComponentLink4Description=https://datasheet.ciiva.com/7849/1784430-7849815.pdf?src-supplier=Element14, ComponentLink4URL=https://datasheet.ciiva.com/7849/1784430-7849815.pdf?src-supplier=Element14, ComponentLink5Description=https://datasheet.ciiva.com/22747/1018594-22747512.pdf?src-supplier=Element14, ComponentLink5URL=https://datasheet.ciiva.com/22747/1018594-22747512.pdf?src-supplier=Element14, ComponentLink6Description=https://datasheet.ciiva.com/12667/pyu-rc0402-51-rohs-l-6-r-12667067.pdf?src-supplier=Mouser, ComponentLink6URL=https://datasheet.ciiva.com/12667/pyu-rc0402-51-rohs-l-6-r-12667067.pdf?src-supplier=Mouser, ComponentLink7Description=https://datasheet.ciiva.com/7983/1018594-7983486.pdf?src-supplier=Element14, ComponentLink7URL=https://datasheet.ciiva.com/7983/1018594-7983486.pdf?src-supplier=Element14, Created=DG, Depth=0.5mm, Height=0.32mm, Lead Free="Lead Free", Lead Pitch=0.2mm, Length=1mm, Manufacturer Part Number=RC0402FR-0710KL, Military Standard=Not, Number of Pins=2, Number of Terminations=2, Packaging="Tape and Reel", Pricing 1="1=0.10000, 10=0.01400, 100=0.00580, 1000=0.00262, 2500=0.00228, 5000=0.00188 (USD)", Pricing 2="1=0.10000, 10=0.01300, 100=0.00400, 1000=0.00300, 2500=0.00300, 10000=0.00200 (USD)", Pricing 3="10000=0.00350 (GBP)", REACH SVHC="No SVHC", RoHS=Yes, Stock 1=40173593, Stock 2=23672167, Stock 3=370000, Supplier 1=Digi-Key, Supplier 2=Mouser, Supplier 3=Farnell, Supplier Part Number 2=603-RC0402FR-0710KL, Supplier Part Number 3=2363463, Termination=SMD/SMT, Voltage Rating (DC)=50V, Width=0.5mm, Working Voltage=50V
R4 R5: "RES SMD 30 OHM 1% 1/16W 0402", Case Code (Imperial)=0402, Case Code (Metric)=1005, Manufacturer=Yageo, Max Operating Temperature=155°C, Max Power Dissipation=63mW, Min Operating Temperature=-55°C, Resistance=30R, Resistance Tolerance=1%, Resistor Type="Thick Film", Supplier Part Number 1=311-30LRCT-ND, Temperature Coefficient=100ppm/°C, Voltage Rating=50V, Case/Package=0402, Category="Chip SMD Resistors", Checked By=?, ComponentLink1Description="Online datasheet", ComponentLink1URL=https://datasheet.ciiva.com/7849/1018594-7849958.pdf, Construction=Rectangular, Contact Plating=Tin,Matte, Created By="D. Gakure", Depth=0.5mm, Features="Moisture Resistant", Height=0.35mm, Lead Free="Lead Free", Length=1mm, Manufacturer Part Number=RC0402FR-0730RL, Military Standard=Not, Number of Terminations=2, Packaging="Tape and Reel", Power Rating=63mW, Pricing 1="1=0.10000, 10=0.01400, 100=0.00580, 1000=0.00260, 2500=0.00226, 5000=0.00186 (USD)", Pricing 2="1=0.10000, 10=0.01200, 50=0.01200, 100=0.00400, 1000=0.00400, 10000=0.00300 (USD)", Pricing 3="10=0.01210, 100=0.00420, 500=0.00370, 2500=0.00280, 5000=0.00250, 10000=0.00230, 50000=0.00150 (GBP)", REACH SVHC=Unknown, RoHS=Yes, RoHS Compliant=Yes, Series=RC, Size Code=0402, Stock 1=2973, Stock 2=41804, Stock 3=4422, Supplier 1=Digi-Key, Supplier 2=Mouser, Supplier 3=Farnell, Supplier Part Number 2=603-RC0402FR-0730RL, Supplier Part Number 3=1458775, Termination=SMD/SMT, Tolerance=1%, Voltage Rating (DC)=50V, Width=0.5mm
R6: "RES SMD 150 OHM 1% 1/16W 0402", Case Code (Imperial)=0402, Case Code (Metric)=1005, Manufacturer=Yageo, Max Operating Temperature=155°C, Max Power Dissipation=63mW, Min Operating Temperature=-55°C, Package Quantity=1, Power Rating=62.5mW, Resistance=150R, Resistance Tolerance=1%, Resistor Type="Thick Film", Supplier Part Number 1=311-150LRCT-ND, Temperature Coefficient=100ppm/°C, Voltage Rating=50V, Case/Package=0402, Category="Chip SMD Resistors", Checked By=?, ComponentLink1Description="ine datasheet", ComponentLink1URL=https://datasheet.ciiva.com/11808/0900766b80c66297-11808422.pdf, Construction=Rectangular, Created By="D. Gakure", Depth=0.5mm, Features="Moisture Resistant", Height=0.016inch, Lead Free="Lead Free", Length=1mm, Manufacturer Part Number=RC0402FR-07150RL, Military Standard=Not, Number of Terminations=2, Packaging="Tape and Reel", Pricing 1="1=0.10000, 10=0.01400, 100=0.00580, 1000=0.00260, 2500=0.00226, 5000=0.00186 (USD)", Pricing 2="1=0.10000, 10=0.01200, 50=0.01200, 100=0.00400, 1000=0.00400, 10000=0.00300 (USD)", Pricing 3="10000=0.00270, 50000=0.00200 (GBP)", REACH SVHC="No SVHC", RoHS=Yes, RoHS Compliant=Yes, Series=RC, Stock 1=5214533, Stock 2=582717, Stock 3=880000, Supplier 1=Digi-Key, Supplier 2=Mouser, Supplier 3=Farnell, Supplier Part Number 2=603-RC0402FR-07150RL, Supplier Part Number 3=2421893, Technology="THICK FILM", Termination=SMD/SMT, Tolerance=1%, Width=0.02inch, Working Voltage=50V
U1: library part NCP114ASN330T1G, "ON SEMICONDUCTOR - NCP114ASN330T1G - LDO Voltage Regulator, Fixed, 1.7 V to 5.5 V in, 3.3 V/300 mA out, 150 mV drop, TSOP-5", Case/Package=SOT-23-5, Dropout Voltage=225mV, Manufacturer="ON Semiconductor", Max Input Voltage=5.5V, Max Operating Temperature=85°C, Min Operating Temperature=-40°C, Min Output Voltage=3.3V, Output Current=300mA, Power Supply Rejection Ratio (PSRR)=75dB, Quiescent Current=95uA, Supplier Part Number 1=NCP114ASN330T1GOSCT-ND, Category="Voltage Regulators - Linear", Checked=?, ComponentLink3Description="On Semi datasheet online", ComponentLink3URL=http://www.onsemi.com/pub/Collateral/NCP114-D.PDF, Created=DG, Lead Free="Lead Free", Manufacturer Part Number=NCP114ASN330T1G, Mount="Surface Mount", Number of Regulators=1, Output Configuration=Positive, Output Type=Fixed, Packaging="Cut Tape", Pricing 1="1=0.33000, 10=0.24900, 25=0.21760, 100=0.12440, 250=0.11664, 500=0.09330, 1000=0.07153 (USD)", RoHS=No, Stock 1=32529, Supplier 1=Digi-Key, Supplier 2=RSComponents, Supplier 3=Mouser, Supplier Part Number 2=1263178, Supplier Part Number 3=863-NCP114ASN330T1G
U2: "MCU 32-Bit STM32G031 ARM Cortex-M0+ RISC 32KB Flash 1.7V to 3.6V 20-Pin TSSOP Tube", Manufacturer=STMicroelectronics, Supplier Part Number 1=497-19774-ND, Category=Microcontrollers, Checked By=?, ComponentLink1Description="Online datasheet", ComponentLink1URL=https://www.st.com/resource/en/datasheet/stm32g031c6.pdf, Created By="D. Gakure", Manufacturer Part Number=STM32G031F6P6, Pricing 1="1=2.39000, 10=2.14400, 25=2.02240, 100=1.72330, 250=1.61808, 500=1.41582, 1000=1.17985 (USD)", Pricing 2="1480=0.78200 (GBP)", RoHS=Yes, Stock 1=166, Supplier 1=Digi-Key, Supplier 2=Farnell, Supplier 3=RSComponents, Supplier Part Number 2=3246918, Supplier Part Number 3=1939834

## Via types
v1: diameter 0.6, hole 0.3, Top Layer to Bottom Layer, tented both sides, 25 vias
v2: diameter 0.6/0.6 (per signal layer), hole 0.3, Top Layer to Bottom Layer, tented both sides, 1 vias

## Nets (pads, with @x,y where several pads share a name; then routed paths per layer and width w, separated by ;. In a path a pad name is that pad's centre, name@x,y a point inside that pad or via, vN(x,y) a via of type N, cw(c..) or ccw(c..) an arc to the next point about the centre after c; other vN are vias at no path point)
3V3: C3.2 C5.2 D1.2 D4.1 J6.1 Q1.1 R2.1 U1.5 U2.4 | length 51.9
  Top Layer w0.3: J6.1 -3.995,-15.231 -1.359,-15.231 -0.533,-14.405 v1(0.419,-14.405)
  Bottom Layer w0.35: U1.5@-7.82,-9.452 -7.82,-9.7 -7.714,-9.806 -7.714,-9.905 C3.2 -6.497,-11.122 -6.497,-12.729 J6.1 ; U1.5 -7.608,-9.24 -7.608,-8.319 -11.136,-4.791 -11.136,5.649 -6.579,10.205 -4.738,10.205 -4.482,9.949 -4.305,9.949 -3.129,11.125 D4.1 ; v1(0.419,-14.405) 1.126,-13.698 1.126,-11.395 1.745,-10.775 U2.4 C5.2@6.475,-10.775 ; C5.2 6.725,-10.55 6.815,-10.55 R2.1@7.462,-9.904 ; R2.1 7.566,-9.904 7.88,-9.59 8.41,-9.59 8.471,-9.529 Q1.1
GND: C1.1 C2.1 C3.1 C4.1 C5.1 C6.1 C7.1 C8.1 C9.1 C10.1 C11.1 C12.1 D1.1 D2.2 D3.2 D6.3 D7.3 D8.3 D9.3 D10.3 D11.3 D12.3 D13.3 J1.2 J6.3 MH1.1 MH2.1 U1.2 U2.5 | length 146.2
  Top Layer w0.5: MH1.1 -13.278,-5.752 C9.1 -13.278,-1.241 ; D12.3 -11.024,2.167 -11.024,1.013 -13.278,-1.241 ; v1(-10.608,10.515) -8.951,10.515 -7.519,9.083 -6.551,9.083 -6.518,9.051 D11.3@-6.235,9.051 ; D13.3 -9.277,-6.471 -9.277,-9.877 v1(-7.307,-11.846) -7.307,-11.873 -6.742,-12.438 -6.742,-12.514 -6.707,-12.55 -5.596,-12.55 J6.3 -5.456,-12.455 -4.207,-11.206 D6.3 -2.146,-11.206 0.127,-8.933 4.533,-8.933 5.537,-9.937 5.82,-9.937 D7.3 8.243,-7.513 9.849,-7.513 10.133,-7.23 ; v1(-6.115,10.824) -6.115,10.797 -5.811,10.492 -5.811,9.475 D11.3 D11.3@-6.235,9.051 ; D3.2 -4.379,13.825 -5.267,12.937 -5.267,12.007 -4.784,11.524 -4.501,11.524 v1(-4.482,11.505) -4.467,11.52 -3.984,11.52 C4.1@-3.695,11.81 ; C4.1 0.908,11.817 2.15,10.575 D10.3 ; v1(2.017,-12.133) 2.017,-13.157 2.31,-13.45 3.8,-13.45 4.2,-13.85 C11.1@4.25,-13.85 ; D2.2 4.675,13.565 v1(4.968,13.272) 4.968,12.3 C12.1 9.286,7.983 9.286,6.009 D9.3 ; v1(7.581,-11.133) 10.069,-8.645 10.069,-7.416 10.133,-7.352 10.133,-7.23 ; v1@10.225,-3.75 v1(10.225,-3.737) 10.98,-2.982 D8.3 10.98,-0.014 12.747,1.753 C8.1 ; v1@10.725,-5.45 v1(10.726,-5.45) v1(10.726,-5.45) 11.32,-6.042 ; v1(13,-4.03) 13,-4.363 11.32,-6.042 ; -13.278,-1.241 -13.278,-1.121 -15.121,0.722 -15.121,3.394 C7.1 -11.151,7.364 -7.379,7.364 -6.235,8.508 D11.3@-6.235,9.051 ; 10.133,-7.23 11.32,-6.042
  Bottom Layer w0.5: v1(-13.344,-3.489) -11.264,-5.571 -11.264,-7.804 C2.1 -9.778,-9.29 -9.778,-9.926 -10.083,-10.23 U1.2@-10.083,-10.362 ; v1(-10.608,10.515) -10.608,10.53 -10.171,10.968 C1.1 ; U1.2 U1.2@-10.083,-10.362 ; C3.1@-7.765,-11.314 -7.326,-11.752 -7.326,-11.827 v1(-7.307,-11.846) ; C3.1 -9.094,-9.939 -9.509,-9.939 -9.932,-10.362 U1.2@-10.083,-10.362 ; v1(-6.115,10.824) -6.115,10.825 -5.543,11.397 D1.1 -5.437,11.505 v1(-4.482,11.505) -4.215,11.505 -2.622,13.097 -2.622,13.108 -1.965,13.766 -1.123,13.766 0,14.888 ; J1.2@0,15.975 0,14.888 ; v1(2.017,-12.133) 2.036,-12.114 2.036,-11.836 2.428,-11.445 U2.5@5.05,-11.445 ; v1@4.949,13.291 4.334,13.906 0.982,13.906 0,14.888 ; U2.5 6.53,-11.425 C5.1@6.73,-11.625 ; C5.1 7.062,-11.625 7.554,-11.133 v1(7.581,-11.133) ; v1(10.225,-3.737) 10.225,-4.922 10.726,-5.423 v1(10.726,-5.45) ; v1(13,-4.03) 13,-5.478 MH2.1
  other v1: 0,18.85
JD_DATA: D3.1 FB1.1 J1.1 MH3.1 | length 18.9
  Top Layer w0.25: MH3.1 -7.001,14.525 D3.1 ; J1.1@-1.27,15.975 -0.459,16.786 0.481,16.786 1.27,17.575 J1.1@1.27,18.6
  Bottom Layer w0.15: MH3.1@-8.101,15.025 MH3.1
  Bottom Layer w0.25: FB1.1 -7.701,11.741 -7.701,14.825 MH3.1 -7.05,14.574 -2.671,14.574 J1.1@-1.27,15.975
JD_DATA_MCU: D1.3 R1.1 U2.20 | length 31.6
  Top Layer w0.25: v1(-10.471,9.688) -9.219,9.688 -7.925,8.394 -7.425,8.394 v2(-7.411,8.408)
  Bottom Layer w0.25: v1(-10.471,9.688) R1.1 ; D1.3 -6.299,9.313 -7.115,8.496 -7.323,8.496 -10.499,5.32 -10.499,-4.559 -6.236,-8.822 U2.20@-0.703,-8.822
JD_PWR: C2.2 C4.2 C6.2 C7.2 C8.2 C9.2 C10.2 C11.2 C12.2 D2.1 D6.1 D7.1 D8.1 D9.1 D10.1 D11.1 D12.1 D13.1 J1.3 MH4.1 R3.1 U1.1 U1.3 | length 113.4
  Top Layer w0.3: v1(-14.32,-1.452) -14.32,-2.704 D12.1@-14.278,-2.747
  Top Layer w0.4: C11.2 5.228,-14.85 6.581,-13.498 8.128,-13.498 9.557,-12.069 11.618,-10.008 D7.1@11.618,-8.805 ; v1(10.757,-7.682) 10.796,-7.72 10.796,-8.364 11.085,-8.653 11.112,-8.653 11.264,-8.805 D7.1@11.618,-8.805 ; v1(13.98,-4.03) 13.942,-4.068 13.942,-5.097 12.042,-6.996 12.042,-8.381 D7.1 D7.1@11.618,-8.805 ; D8.1@14.24,1.564 14.24,-0.404 v1(14.269,-0.433)
  Top Layer w0.5: C9.2 -14.278,-2.747 -14.278,-2.687 D12.1 ; C7.2 -11.821,8.108 D11.1 -11.609,8.343 -9.562,8.343 -9.527,8.379 v1(-9.5,8.379) ; v1(-10.265,-11.626) -10.238,-11.626 -10.019,-11.845 -8.569,-11.845 D13.1 -8.357,-12.313 C10.2 ; C4.2 -3.67,12.817 -3.67,12.955 -2.75,13.875 D10.1 ; J1.3@-1.27,18.85 -1.27,17.575 -2.466,16.379 -2.466,13.891 D10.1 ; D6.1 2.754,-14.506 3.098,-14.85 3.932,-14.85 ; C12.2 6.875,11.807 D9.1@8.154,11.807 ; v1(10.712,9.263) 10.699,9.263 D9.1 D9.1@8.154,11.807 ; C8.2 13.747,3.781 14.164,3.363 14.164,2.334 D8.1 ; D10.1 -2.15,13.875 -1.51,14.515 -0.152,14.515 1.27,15.937 1.27,15.975 1.333,15.975 2.221,15.087 3.062,15.087 3.885,14.265 4.922,14.265 5.204,14.547 7.021,14.547 MH4.1 7.499,14.349 8.165,13.683 8.165,12.101 8.154,12.09 D9.1@8.154,11.807
  Bottom Layer w0.3: U1.3@-10.86,-9.806 U1.3 ; MH4.1@6.982,14.508 MH4.1
  Bottom Layer w0.35: R3.1 10.204,-6.446 10.71,-6.952 10.71,-7.634 v1(10.757,-7.682)
  Bottom Layer w0.4: v1(13.98,-4.03) 13.98,-3.975 14.251,-3.704 v1@14.251,-0.451
  Bottom Layer w0.5: U1.1 -9.552,-11.043 -10.116,-11.607 -10.246,-11.607 v1(-10.265,-11.626) -11.282,-10.609 -11.282,-10.194 -10.788,-9.7 -10.782,-9.7 -12.092,-8.391 -12.092,-6.066 -14.32,-3.837 v1(-14.32,-1.452) -14.32,5.147 -11.088,8.379 v1(-9.5,8.379) -9.5,8.396 -4.675,13.221 v1(-3.453,13.221) ; v1(10.712,9.263) 14.269,5.706 v1(14.269,-0.433)
JD_RGB_B: R4.2 U2.8 | length 34.5
  Bottom Layer w0.25: R4.2 4.227,11.85 11.769,4.308 11.769,-8.522 6.916,-13.375 U2.8@5.174,-13.375
JD_RGB_G: R5.2 U2.9 | length 36.6
  Bottom Layer w0.25: R5.2@1.859,12.966 4.12,12.966 12.271,4.815 12.271,-8.74 6.986,-14.025 U2.9@5.174,-14.025
JD_RGB_R: R6.2 U2.7 | length 32.5
  Bottom Layer w0.25: R6.2@1.875,10.835 4.308,10.835 11.307,3.836 11.307,-8.388 6.97,-12.725 U2.7@5.174,-12.725
M_RGB_LED: Q1.2 R2.2 U2.14 | length 15
  Top Layer w0.22: v1(0.182,-12.783) 0.609,-12.356 0.609,-10.194 1.228,-9.575 4.198,-9.575 5.478,-10.854 6.151,-10.854 8.111,-8.894 v1(8.111,-8.816)
  Bottom Layer w0.2: U2.14@-0.624,-12.773 -0.619,-12.778 0.177,-12.778 v1(0.182,-12.783)
  Bottom Layer w0.25: R2.2 6.789,-9.179 6.789,-8.842 Q1.2 7.481,-8.185 v1(8.111,-8.816)
NetC1_2: C1.2 FB1.2 R1.2 | length 2.3
  Bottom Layer w0.25: C1.2 -9.471,11.607 -8.62,10.756 FB1.2 R1.2@-9.261,10.039
NetD4_2: D4.2 R6.1 | length 1.9
  Bottom Layer w0.25: D4.2 -0.75,11.05 -0.5,10.8 -0.45,10.8 -0.375,10.725 R6.1
NetD4_3: D4.3 R5.1 | length 1.9
  Bottom Layer w0.25: D4.3 -0.75,12.7 -0.327,13.123 0.725,13.123 0.85,12.998 R5.1
NetD4_4: D4.4 R4.1 | length 3.1
  Bottom Layer w0.25: D4.4 -1.85,12.475 -1.225,11.85 R4.1
NetD6_2: D6.2 D7.4 | length 7
  Top Layer w0.34: D6.2 2.754,-11.206 3.034,-11.486 3.034,-11.513 4.399,-12.878 7.149,-12.878 7.969,-12.058 D7.4
NetD7_2: D7.2 D8.4 | length 6.6
  Top Layer w0.34: D7.2 9.497,-5.864 9.814,-5.547 9.814,-5.475 12.73,-2.558 14.156,-2.558 D8.4
NetD8_2: D8.2 D9.4 | length 6.3
  Top Layer w0.34: D8.2 11.01,2.248 11.01,7.349 11.792,8.13 D9.4
NetD9_2: D9.2 D10.4 | length 6.2
  Top Layer w0.34: D10.4@2.45,13.775 2.841,13.775 3.021,13.595 3.021,13.204 4.525,11.7 4.525,10.77 D9.2
NetD10_2: D10.2 D11.4 | length 6.5
  Top Layer w0.34: D11.4 -8.144,11.808 -5.91,11.808 -4.651,10.55 D10.2@-2.445,10.55
NetD11_2: D11.2 D12.4 | length 6.4
  Top Layer w0.34: D12.4 -14.271,2.52 -13.991,2.8 -13.979,2.8 -11.193,5.586 -9.7,5.586 D11.2
NetD12_2: D12.2 D13.4 | length 6.3
  Top Layer w0.34: D13.4 -11.822,-8.365 -10.971,-7.513 D12.2
nRESET: J6.5 U2.6 | length 15
  Bottom Layer w0.25: J6.5 -4.656,-12.031 -4.656,-14.24 -3.586,-15.309 0.609,-15.309 3.842,-12.075 U2.6 ; U2.6@5.05,-12.15 5.099,-12.15 U2.6@5.126,-12.123
RGB_LED: D6.4 Q1.3 R3.2 | length 19.6
  Top Layer w0.25: D6.4 -2.146,-14.506 -1.411,-13.771 0.574,-13.771 1.35,-12.995 1.35,-10.66 1.86,-10.15 3.625,-10.15 4.895,-11.42 6.335,-11.42 v1(9.394,-8.361)
  Bottom Layer w0.2: Q1.3@9.432,-7.593 Q1.3@9.467,-7.558
  Bottom Layer w0.25: v1(9.394,-8.361) 9.394,-8.267 9.497,-8.164 9.497,-7.478 Q1.3 9.567,-7.408 9.567,-7.019 9.532,-6.983 9.532,-5.944 9.479,-5.891 9.479,-5.714 R3.2
SWCLK: J6.4 U2.19 | length 5.4
  Bottom Layer w0.25: J6.4 -3.296,-11.926 -3.296,-10.269 -2.55,-9.523 U2.19@-0.624,-9.523
SWDIO: J6.2 U2.18 | length 5.9
  Bottom Layer w0.25: J6.2 -2.794,-12.694 -2.794,-10.602 -2.365,-10.173 U2.18@-0.624,-10.173
pads on no net: D13.2 J1. U1.4 U2.1 U2.2 U2.3 U2.10 U2.11 U2.12 U2.13 U2.15 U2.16 U2.17

## Silkscreen, mask and mechanical layers (free items; w line width, h text height)
Top Overlay:
  region: 187 vertices and 1 holes, not listed, extent -14.533,-8.033 -12.357,-4.998
  text "7" at -11.725,-7 h1.5
  text "0" at 3.85,-13.2 h1.5
Bottom Overlay:
  drawing of 10 lines, arcs and shapes, not listed
  text "RGB LED" at -9.943,8.606 h1.2 r64
  text "'.ProjectCodenameID'-'.ProjectRevision'" at 12.883,7.838 h1
  text "8 ring" at -8.748,6.55 h1.2 r64
Dimension:
  lines w0.1: -15.916,-5.697 ccw(c-15.001,-7.475) -14.177,-9.297 cw(c-13.764,-10.209) -12.955,-9.622 ccw(c-0.001,-0.23) 12.953,-9.622 cw(c13.762,-10.209) 14.175,-9.297 ccw(c14.999,-7.475) 15.914,-5.697 cw(c16.371,-4.807) 15.408,-4.538 ccw(c-0.001,-0.23) 9.472,12.664 cw(c10.064,13.47) 9.209,13.988 ccw(c7.499,15.025) 5.634,15.746 cw(c4.701,16.107) 4.424,15.146 ccw(c-0.001,-0.23) 3.99,15.264 ccw(c3.944,15.182) 3.963,15.274 cw(c4.276,16.225) 3.275,16.224 3.275,20.475 ccw(c2.476,20.475) 2.476,21.274 -2.466,21.274 ccw(c-2.466,20.475) -3.265,20.475 -3.265,16.224 cw(c-4.266,16.225) -3.953,15.274 ccw(c-0.001,-0.23) -4.426,15.146 cw(c-4.703,16.107) -5.636,15.746 ccw(c-7.501,15.025) -9.211,13.988 cw(c-10.067,13.47) -9.474,12.664 ccw(c-0.001,-0.23) -15.41,-4.538 cw(c-16.373,-4.807) -15.916,-5.697 ; -9.987,-0.73 -9.925,-1.53 -9.775,-2.33 -9.44,-3.53 -9.028,-4.53 -8.721,-5.124 -8.153,-6.02 -7.862,-6.41 -7.394,-6.962 -6.95,-7.43 -6.5,-7.83 -6.177,-8.094 ccw(c-5.695,-7.613) -5.694,-8.294 -5.578,-8.293 5.529,-8.293 ccw(c5.527,-7.062) 6.396,-7.934 6.55,-7.78 7.225,-7.155 7.581,-6.751 7.873,-6.396 8.513,-5.476 8.925,-4.73 9.27,-3.98 9.518,-3.304 9.675,-2.783 9.88,-1.839 9.972,-1.121 10.006,-0.462 10.014,-0.149 9.988,0.27 9.96,0.69 9.902,1.177 9.825,1.641 9.695,2.22 9.418,3.131 9.066,3.99 8.713,4.679 8.125,5.62 7.125,6.795 6.18,7.632 5.529,8.102 4.75,8.57 4.031,8.922 3.27,9.22 2.53,9.445 1.958,9.576 1.35,9.678 0.889,9.73 0.328,9.759 -0.311,9.767 -0.966,9.755 -1.977,9.573 -2.794,9.372 -3.901,8.977 -4.403,8.748 -5.267,8.271 -5.578,8.069 -6.165,7.634 -6.95,6.97 -7.394,6.503 -8.153,5.56 -8.332,5.299 -8.498,5.041 -8.95,4.245 -9.065,3.991 -9.225,3.62 -9.559,2.707 -9.682,2.27 -9.825,1.595 -9.95,0.82 -9.987,0.27 -9.987,-0.73
Board Outline:
  lines w0.2: -15.916,-5.697 ccw(c-16.373,-4.807) -15.41,-4.538 cw(c-0.001,-0.23) -9.474,12.664 ccw(c-10.067,13.47) -9.211,13.988 cw(c-7.501,15.025) -5.636,15.746 ccw(c-4.703,16.107) -4.426,15.146 cw(c-0.001,-0.23) -3.953,15.274 ccw(c-4.266,16.225) -3.265,16.224 -3.265,20.475 cw(c-2.466,20.475) -2.466,21.274 2.476,21.274 cw(c2.476,20.475) 3.275,20.475 3.275,16.224 ccw(c4.276,16.225) 3.963,15.274 cw(c3.944,15.182) 3.99,15.264 cw(c-0.001,-0.23) 4.424,15.146 ccw(c4.701,16.107) 5.634,15.746 cw(c7.499,15.025) 9.209,13.988 ccw(c10.064,13.47) 9.472,12.664 cw(c-0.001,-0.23) 15.408,-4.538 ccw(c16.371,-4.807) 15.914,-5.697 cw(c14.999,-7.475) 14.175,-9.297 ccw(c13.762,-10.209) 12.953,-9.622 cw(c-0.001,-0.23) -12.955,-9.622 ccw(c-13.764,-10.209) -14.177,-9.297 cw(c-15.001,-7.475) -15.916,-5.697 ; -9.987,-0.73 -9.987,0.27 -9.95,0.82 -9.825,1.595 -9.682,2.27 -9.559,2.707 -9.225,3.62 -9.065,3.991 -8.95,4.245 -8.498,5.041 -8.332,5.299 -8.153,5.56 -7.394,6.503 -6.95,6.97 -6.165,7.634 -5.578,8.069 -5.267,8.271 -4.403,8.748 -3.901,8.977 -2.794,9.372 -1.977,9.573 -0.966,9.755 -0.311,9.767 0.328,9.759 0.889,9.73 1.35,9.678 1.958,9.576 2.53,9.445 3.27,9.22 4.031,8.922 4.75,8.57 5.529,8.102 6.18,7.632 7.125,6.795 8.125,5.62 8.713,4.679 9.066,3.99 9.418,3.131 9.695,2.22 9.825,1.641 9.902,1.177 9.96,0.69 9.988,0.27 10.014,-0.149 10.006,-0.462 9.972,-1.121 9.88,-1.839 9.675,-2.783 9.518,-3.304 9.27,-3.98 8.925,-4.73 8.513,-5.476 7.873,-6.396 7.581,-6.751 7.225,-7.155 6.55,-7.78 6.396,-7.934 cw(c5.527,-7.062) 5.529,-8.293 -5.578,-8.293 -5.694,-8.294 cw(c-5.695,-7.613) -6.177,-8.094 -6.5,-7.83 -6.95,-7.43 -7.394,-6.962 -7.862,-6.41 -8.153,-6.02 -8.721,-5.124 -9.028,-4.53 -9.44,-3.53 -9.775,-2.33 -9.925,-1.53 -9.987,-0.73
Top Assy:
  lines w0.1: -15.916,-5.697 ccw(c-15.001,-7.475) -14.177,-9.297 cw(c-13.764,-10.209) -12.955,-9.622 ccw(c-0.001,-0.23) 12.953,-9.622 cw(c13.762,-10.209) 14.175,-9.297 ccw(c14.999,-7.475) 15.914,-5.697 cw(c16.371,-4.807) 15.408,-4.538 ccw(c-0.001,-0.23) 9.472,12.664 cw(c10.064,13.47) 9.209,13.988 ccw(c7.499,15.025) 5.634,15.746 cw(c4.701,16.107) 4.424,15.146 ccw(c-0.001,-0.23) 3.99,15.264 ccw(c3.944,15.182) 3.963,15.274 cw(c4.276,16.225) 3.275,16.224 3.275,20.475 ccw(c2.476,20.475) 2.476,21.274 -2.466,21.274 ccw(c-2.466,20.475) -3.265,20.475 -3.265,16.224 cw(c-4.266,16.225) -3.953,15.274 ccw(c-0.001,-0.23) -4.426,15.146 cw(c-4.703,16.107) -5.636,15.746 ccw(c-7.501,15.025) -9.211,13.988 cw(c-10.067,13.47) -9.474,12.664 ccw(c-0.001,-0.23) -15.41,-4.538 cw(c-16.373,-4.807) -15.916,-5.697 ; -9.987,-0.73 -9.925,-1.53 -9.775,-2.33 -9.44,-3.53 -9.028,-4.53 -8.721,-5.124 -8.153,-6.02 -7.862,-6.41 -7.394,-6.962 -6.95,-7.43 -6.5,-7.83 -6.177,-8.094 ccw(c-5.695,-7.613) -5.694,-8.294 -5.578,-8.293 5.529,-8.293 ccw(c5.527,-7.062) 6.396,-7.934 6.55,-7.78 7.225,-7.155 7.581,-6.751 7.873,-6.396 8.513,-5.476 8.925,-4.73 9.27,-3.98 9.518,-3.304 9.675,-2.783 9.88,-1.839 9.972,-1.121 10.006,-0.462 10.014,-0.149 9.988,0.27 9.96,0.69 9.902,1.177 9.825,1.641 9.695,2.22 9.418,3.131 9.066,3.99 8.713,4.679 8.125,5.62 7.125,6.795 6.18,7.632 5.529,8.102 4.75,8.57 4.031,8.922 3.27,9.22 2.53,9.445 1.958,9.576 1.35,9.678 0.889,9.73 0.328,9.759 -0.311,9.767 -0.966,9.755 -1.977,9.573 -2.794,9.372 -3.901,8.977 -4.403,8.748 -5.267,8.271 -5.578,8.069 -6.165,7.634 -6.95,6.97 -7.394,6.503 -8.153,5.56 -8.332,5.299 -8.498,5.041 -8.95,4.245 -9.065,3.991 -9.225,3.62 -9.559,2.707 -9.682,2.27 -9.825,1.595 -9.95,0.82 -9.987,0.27 -9.987,-0.73
Bottom Assy:
  lines w0.1: -15.916,-5.697 ccw(c-15.001,-7.475) -14.177,-9.297 cw(c-13.764,-10.209) -12.955,-9.622 ccw(c-0.001,-0.23) 12.953,-9.622 cw(c13.762,-10.209) 14.175,-9.297 ccw(c14.999,-7.475) 15.914,-5.697 cw(c16.371,-4.807) 15.408,-4.538 ccw(c-0.001,-0.23) 9.472,12.664 cw(c10.064,13.47) 9.209,13.988 ccw(c7.499,15.025) 5.634,15.746 cw(c4.701,16.107) 4.424,15.146 ccw(c-0.001,-0.23) 3.99,15.264 ccw(c3.944,15.182) 3.963,15.274 cw(c4.276,16.225) 3.275,16.224 3.275,20.475 ccw(c2.476,20.475) 2.476,21.274 -2.466,21.274 ccw(c-2.466,20.475) -3.265,20.475 -3.265,16.224 cw(c-4.266,16.225) -3.953,15.274 ccw(c-0.001,-0.23) -4.426,15.146 cw(c-4.703,16.107) -5.636,15.746 ccw(c-7.501,15.025) -9.211,13.988 cw(c-10.067,13.47) -9.474,12.664 ccw(c-0.001,-0.23) -15.41,-4.538 cw(c-16.373,-4.807) -15.916,-5.697 ; -9.987,-0.73 -9.925,-1.53 -9.775,-2.33 -9.44,-3.53 -9.028,-4.53 -8.721,-5.124 -8.153,-6.02 -7.862,-6.41 -7.394,-6.962 -6.95,-7.43 -6.5,-7.83 -6.177,-8.094 ccw(c-5.695,-7.613) -5.694,-8.294 -5.578,-8.293 5.529,-8.293 ccw(c5.527,-7.062) 6.396,-7.934 6.55,-7.78 7.225,-7.155 7.581,-6.751 7.873,-6.396 8.513,-5.476 8.925,-4.73 9.27,-3.98 9.518,-3.304 9.675,-2.783 9.88,-1.839 9.972,-1.121 10.006,-0.462 10.014,-0.149 9.988,0.27 9.96,0.69 9.902,1.177 9.825,1.641 9.695,2.22 9.418,3.131 9.066,3.99 8.713,4.679 8.125,5.62 7.125,6.795 6.18,7.632 5.529,8.102 4.75,8.57 4.031,8.922 3.27,9.22 2.273,9.523 1.35,9.678 0.889,9.73 0.328,9.759 -0.311,9.767 -0.966,9.755 -1.977,9.573 -2.794,9.372 -3.901,8.977 -4.403,8.748 -5.267,8.271 -5.578,8.069 -6.165,7.634 -6.95,6.97 -7.394,6.503 -8.153,5.56 -8.332,5.299 -8.498,5.041 -8.95,4.245 -9.065,3.991 -9.225,3.62 -9.559,2.707 -9.682,2.27 -9.825,1.595 -9.95,0.82 -9.987,0.27 -9.987,-0.73

## Text inside footprints (layer, text, board x,y; h text height)
J1: Alignment "board outline  / for 'outie'" at -5.14,16.289 h1.2; Alignment "board outline  / for 'innie'" at -4.53,13.444 h1.2; Mechanical 9 "Jacdac / cable connector  / body" at 4.821,25.433 h1.7
MH4: Alignment "board outline can  / be on 2.0mm   / radius if necessary" at 10.426,10.522 h0.5; Alignment "5mm dia keepout  / for traces and  / components to  / allow space for  / bushes/standoffs/ / nuts/screw heads" at 10.426,14.156 h0.5